# Altium PCB NRF52840-Beacon-V1-1.PcbDoc
Units mm, origin at the board's own origin, x right, y up, seen from the top; angles counter-clockwise.
Board outline 30 x 30 mm, 2 copper layers (Top Layer, Bottom Layer), stack 1.54 mm thick; 62 components, 49 nets, 185 pads, 133 vias.
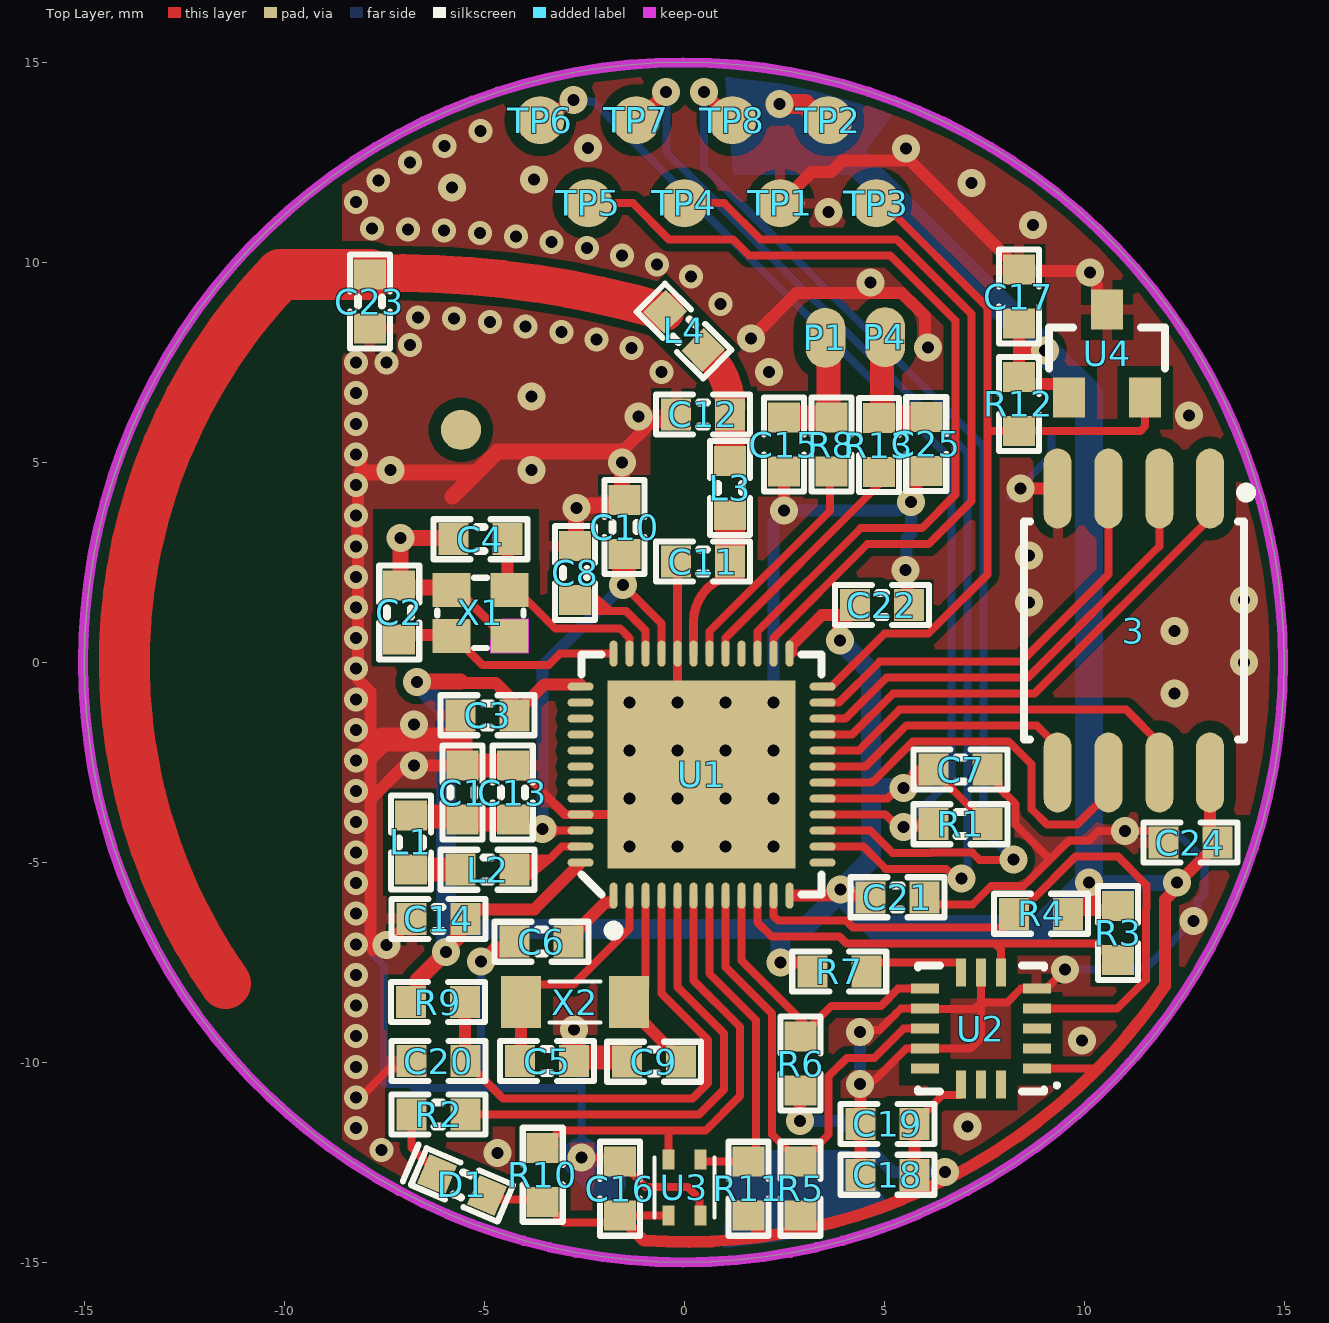
[diagram p0: Top Layer view]
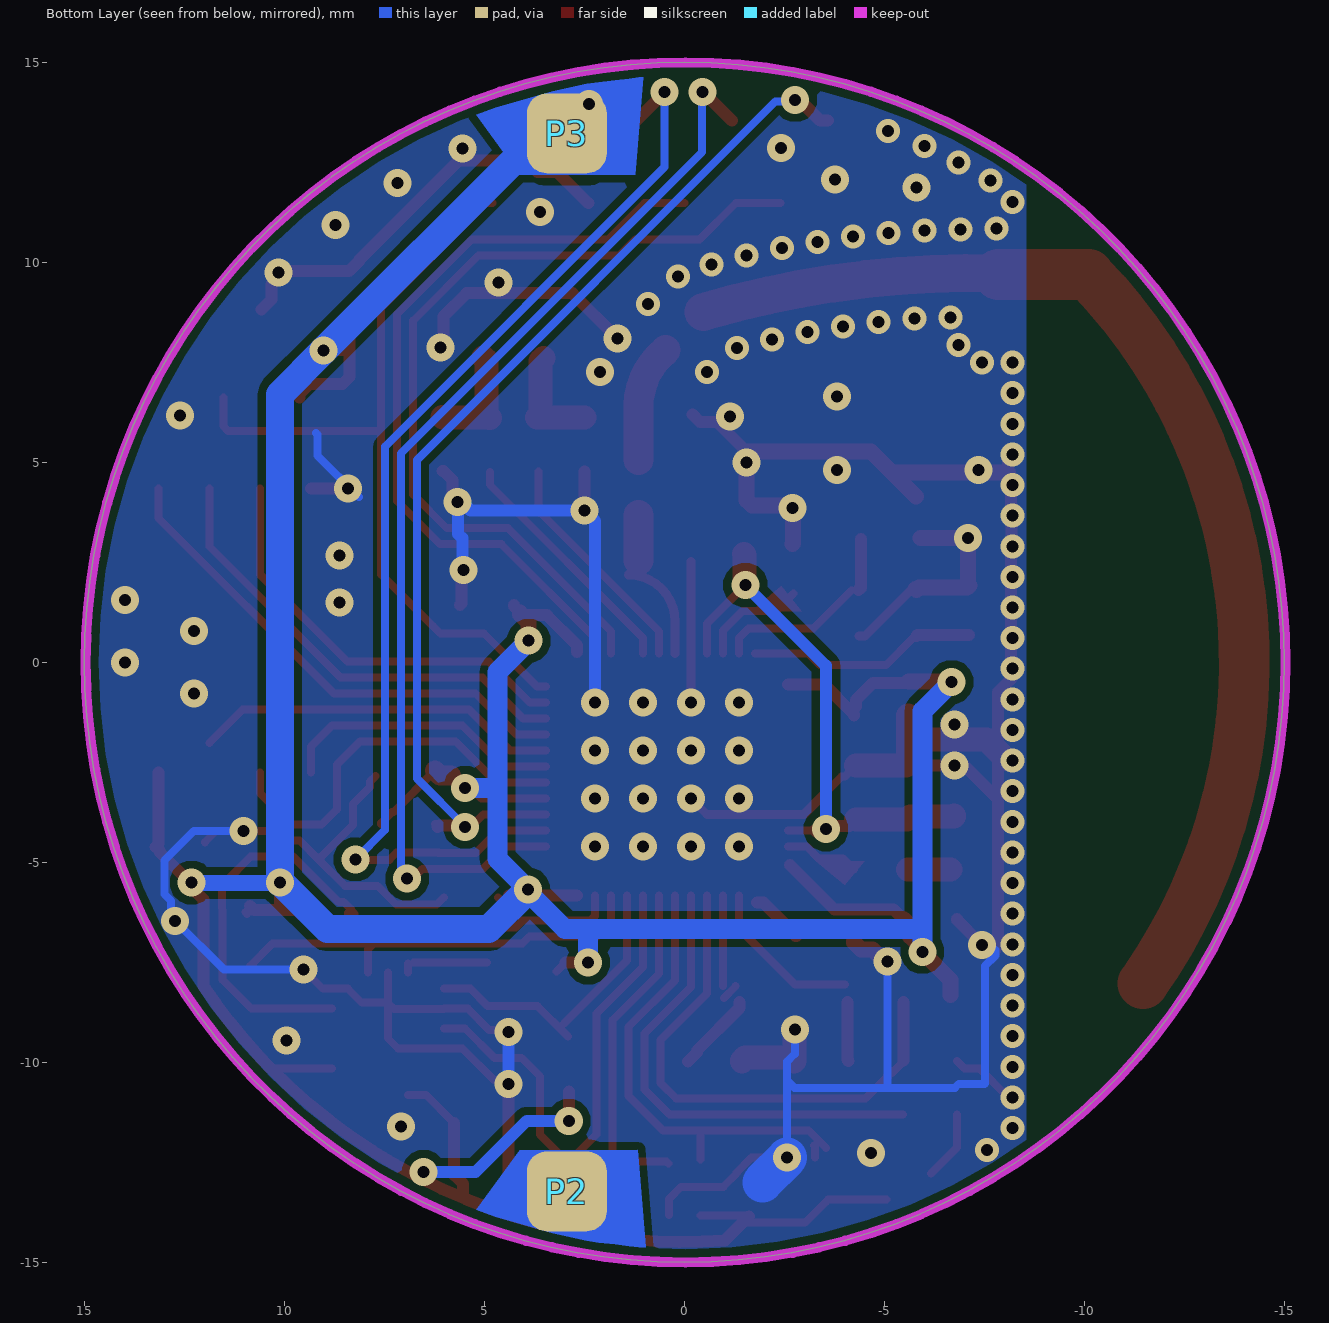
[diagram p1: Bottom Layer view, seen from below]

## Layer stack, top to bottom
Top Solder: solder mask 0.0102, Solder Resist, Dk 3.5
Top Layer: signal copper 0.035
Dielectric 1: dielectric 1.47, FR-4, Dk 4.6
Bottom Layer: signal copper 0.035
Bottom Solder: solder mask 0.0102, Solder Resist, Dk 3.5

## Board outline
-15,0 ccw(c0,0) 0,-15 ccw(c0,0) 15,0 ccw(c0,0) 0,15 ccw(c0,0)

## Design rules (kind name [scope] priority, off if disabled: settings)
Clearance [All] p1: gap=0.2 ignorepadtopadclearanceinfootprint=FALSE except(0.3: SMDPad-Poly THPad-Poly)
PolygonConnect [All] p1: thpad.connectstyle=Relief thpad.reliefconductorwidth=0.254 thpad.reliefentries=4 thpad.polygonreliefangle="90 Angle" thpad.airgapwidth=0.254 smdpad.connectstyle=Relief smdpad.reliefconductorwidth=0.254 smdpad.reliefentries=4 smdpad.polygonreliefangle="90 Angle" smdpad.airgapwidth=0.254 via.connectstyle=Direct via.reliefconductorwidth=0.254 via.reliefentries=4 via.polygonreliefangle="90 Angle" via.airgapwidth=0.254
RoutingVias [All] p1: holewidth=0.711 width=1.27 viastyle="Through Hole" minholewidth=0.711 minwidth=1.27 maxholewidth=0.711 maxwidth=1.27
SolderMaskExpansion [All] p1: expansion=0.102 istentingtop=FALSE
Width [All] p1: maxlimit=3 minlimit=0.2 preferedwidth=0.4
30 further rules are at their usual default settings.

## Components (designator, comment, footprint, x,y, rotation, side; value= is the part's Value field where it differs from the comment)
3 "W25Q-FLASH" SO8W_M 11.239,0.794 r270 top
C1 "1.0µF" CAPC1608N -5.546,-3.255 r270 top
C2 "12pF" CAPC1608N -7.128,1.246 r90 top
C3 "1.0µF" CAPC1608N -4.917,-1.324 r180 top
C4 "12pF" CAPC1608N -5.096,3.077 r180 top
C5 "12pF" CAPC1608N -3.429,-9.97 r0 top
C6 "100nF" CAPC1608N -3.572,-6.985 r180 top
C7 "100nF" CAPC1608N 6.906,-2.683 r0 top
C8 "100pF" CAPC1608N -2.728,2.234 r90 top
C9 "12pF" CAPC1608N -0.762,-9.986 r180 top
C10 "N.C." CAPC1608N -1.493,3.379 r270 top
C11 "1.0pF" CAPC1608N 0.471,2.517 r0 top
C12 "1.2pF" CAPC1608N 0.471,6.199 r0 top
C13 "47nF" CAPC1608N -4.288,-3.255 r90 top
C14 "100nF" CAPC1608N -6.144,-6.413 r180 top
C15 "300pF" CAPC1608N 2.492,5.445 r270 top
C16 "100nF" CAPC1608N -1.603,-13.16 r270 top
C17 "100nF" CAPC1608N 8.366,9.144 r90 top
C18 "10uF" CAPC1608N 5.08,-12.811 r180 top
C19 "100nF" CAPC1608N 5.08,-11.541 r180 top
C20 "1uF" CAPC1608N -6.144,-9.97 r180 top
C21 "100nF" CAPC1608N 5.334,-5.874 r0 top
C22 "100nF" CAPC1608N 4.937,1.429 r0 top
C23 "1.2pF" CAPC1608N -7.858,9.017 r270 top
C24 "100nF" CAPC1608N 12.652,-4.508 r180 top
C25 "300pF" CAPC1608N 6.048,5.461 r270 top
D1 "LED" LED_0603 -5.556,-13.065 r157 top
L1 "15nH" INDC1608N -6.836,-4.501 r270 top
L2 "10µH" INDC1608N -4.917,-5.186 r0 top
L3 "4.7nH" INDC1608N 1.145,4.358 r90 top
L4 "2.2nH" INDC1608N -0.006,8.286 r135 top
P1 "PIN" PIN#1 3.524,8.112 r90 top
P2 "PIN" PIN#2 4.985,-16.669 r180 bottom
P3 "PIN" PIN#3 2.984,13.224 r0 bottom
P4 "PIN" PIN#1 5.016,8.128 r90 top
R1 "10K" RESC1608N 6.906,-4.048 r0 top
R2 "1K" RESC1608N -6.144,-11.303 r180 top
R3 "10K" RESC1608N 10.843,-6.763 r270 top
R4 "10K" RESC1608N 8.922,-6.286 r180 top
R5 "10K" RESC1608N 2.905,-13.16 r90 top
R6 "10K" RESC1608N 2.905,-10.033 r90 top
R7 "10K" RESC1608N 3.873,-7.731 r0 top
R8 "0R" RESC1608N 3.678,5.445 r270 top
R9 "2M" RESC1608N -6.159,-8.493 r180 top
R10 "10K" RESC1608N -3.54,-12.811 r90 top
R11 "10K" RESC1608N 1.603,-13.16 r90 top
R12 "10K" RESC1608N 8.366,6.461 r270 top
R13 "0R" RESC1608N 4.863,5.429 r270 top
TP1 "PIN" PIN#4 2.4,11.478 r0 top
TP2 "PIN" PIN#4 3.6,13.556 r0 top
TP3 "PIN" PIN#4 4.8,11.478 r0 top
TP4 "PIN" PIN#4 0,11.478 r0 top
TP5 "PIN" PIN#4 -2.4,11.478 r0 top
TP6 "PIN" PIN#4 -3.6,13.556 r0 top
TP7 "PIN" PIN#4 -1.2,13.556 r0 top
TP8 "PIN" PIN#4 1.2,13.556 r0 top
U1 "nRF52840-QFAA" QFN40P600X600X90-48N 0.432,-2.806 r90 top
U2 "LIS3DH" LGA-16 7.414,-9.16 r180 top
U3 "SHT40" SHT40 0,-13.129 r270 top
U4 "DRV5032" SOT-23 10.573,7.715 r0 top
X1 "32MHz" CRYSTAL_2016_NT -5.096,1.235 r180 top
X2 "32.768kHz" CRYSTAL_3215 -2.73,-8.493 r180 top

## Footprints (in the part's own frame and the unit in brackets; to place one, negate y for a bottom-side part, rotate by r counter-clockwise, add the part's x,y. Pads: shape width x height; smd on the part's side, far side on the other; paste and mask are expansions set on the pad)
CAPC1608N [mm] "Chip Capacitor, Body 1.6x0.8mm, IPC Medium Density"
  rect 0.75x0.8 smd: 1(-0.675,0) 2(0.675,0)
  silkscreen extent -1.17,-0.5 1.18,0.5, body extent -0.8,-0.4 0.8,0.4, height 0.8
CRYSTAL_2016_NT [mm]
  rect 0.95x0.85 smd: 1(-0.725,-0.575) 2(-0.725,0.575) 2(0.725,-0.575) 3(0.725,0.575)
  Top Layer lines w0.225: 0.725,-0.575 0.709,-0.575 0.575,-0.575 -0.575,0.575 -0.725,0.575
  Top Layer keep-out lines w0.01: -0.25,0.65 -0.25,1 -1.2,1 -1.2,0.15 -0.55,0.15
  silkscreen extent -1.08,-0.88 1.08,0.88, body extent -1.05,-0.85 1.05,0.85, height 0.56
CRYSTAL_3215 [mm] "3.2mm * 1.5mm"
  rect 1x1.3 smd: 1(-1.35,0) 2(1.35,0)
  silkscreen extent -0.64,-0.51 0.64,0.51, body extent -1.6,-0.5 1.6,0.5, height 0.8
INDC1608N [mm] "Chip Inductor, Body 1.6x0.8mm, IPC Medium Density"
  rect 0.75x0.8 smd: 1(-0.675,0) 2(0.675,0)
  silkscreen extent -1.18,-0.5 1.17,0.5, body extent -0.8,-0.4 0.8,0.4, height 0.8
LED_0603 [mm]
  rect 0.75x0.8 smd: 1(-0.675,0) 2(0.675,0)
  silkscreen extent -1.17,-0.5 1.4,0.5, body extent -1.25,-0.55 1.25,0.55, height 0.8
LGA-16 [mm] "LGA, 16-Leads, Body 3x3mm, Pitch 0.5mm"
  rect 0.7x0.25 smd: 1(-1.4,1) 2(-1.4,0.5) 3(-1.4,0) 4(-1.4,-0.5) 5(-1.4,-1) 9(1.4,-1) 10(1.4,-0.5) 11(1.4,0) 12(1.4,0.5) 13(1.4,1)
  rect 0.25x0.7 smd: 6(-0.5,-1.4) 7(0,-1.4) 8(0.5,-1.4) 14(0.5,1.4) 15(0,1.4) 16(-0.5,1.4)
  silkscreen extent -1.95,-1.58 1.58,1.58, body extent -1.5,-1.5 1.5,1.5, height 1
PIN#1 [mm]
  oval 1.5x1 smd: 1(0,0)
PIN#2 [mm]
  rrect50% 2x2 smd: 1(2.048,3.445)
PIN#3 [mm]
  rrect50% 2x2 smd: 1(-0.048,0)
PIN#4 [mm]
  round 1.2 smd paste-2539.97: 1(0,0)
QFN40P600X600X90-48N [mm] "QFN, 48-Leads, Body 6,0x6,0mm (max), Pitch 0,40mm, IPC Medium Density"
  oval 0.65x0.2 smd: 1(-3.025,2.2) 2(-3.025,1.8) 3(-3.025,1.4) 4(-3.025,1) 5(-3.025,0.6) 6(-3.025,0.2) 7(-3.025,-0.2) 8(-3.025,-0.6) 9(-3.025,-1) 10(-3.025,-1.4) 11(-3.025,-1.8) 12(-3.025,-2.2) 25(3.025,-2.2) 26(3.025,-1.8) 27(3.025,-1.4) 28(3.025,-1) 29(3.025,-0.6) 30(3.025,-0.2) 31(3.025,0.2) 32(3.025,0.6) 33(3.025,1) 34(3.025,1.4) 35(3.025,1.8) 36(3.025,2.2)
  oval 0.2x0.65 smd: 13(-2.2,-3.025) 14(-1.8,-3.025) 15(-1.4,-3.025) 16(-1,-3.025) 17(-0.6,-3.025) 18(-0.2,-3.025) 19(0.2,-3.025) 20(0.6,-3.025) 21(1,-3.025) 22(1.4,-3.025) 23(1.8,-3.025) 24(2.2,-3.025) 37(2.2,3.025) 38(1.8,3.025) 39(1.4,3.025) 40(1,3.025) 41(0.6,3.025) 42(0.2,3.025) 43(-0.2,3.025) 44(-0.6,3.025) 45(-1,3.025) 46(-1.4,3.025) 47(-1.8,3.025) 48(-2.2,3.025)
  rect 4.7x4.7 smd: 49(0,0)
  silkscreen extent -4.02,-3 3,3, body extent -3.02,-3.02 3.02,3.02, height 0.86
RESC1608N [mm] "Chip Resistor, Body 1.6x0.8mm, IPC Medium Density"
  rect 0.75x0.8 smd: 1(-0.675,0) 2(0.675,0)
  silkscreen extent -1.17,-0.5 1.17,0.5, body extent -0.82,-0.48 0.82,0.48, height 0.5
SHT40 [mm]
  rect 0.5x0.3 smd: 1(-0.7,0.4) 2(-0.7,-0.4) 3(0.7,-0.4) 4(0.7,0.4)
  silkscreen extent -0.75,-0.75 0.75,0.75, body extent -0.75,-0.75 0.75,0.75, height 0.69
SO8W_M [mm] "8-Pin Small Outline Package 1.27 mm Pitch, IPC Low Density"
  oval 2x0.7 smd: 1(-3.55,1.905) 2(-3.55,0.635) 3(-3.55,-0.635) 4(-3.55,-1.905) 5(3.55,-1.905) 6(3.55,-0.635) 7(3.55,0.635) 8(3.55,1.905)
  silkscreen extent -3.57,-2.75 2.73,2.93, body extent -4.05,-2.73 4.05,2.73, height 1.75
SOT-23 [mm] "SOT-23; 3 Leads; Body 3.0 x 2.6 mm, inc. leads (LxW max)"
  rect 0.8x1 smd: 1(-0.95,-1.1) 2(0.95,-1.1) 3(0,1.1)
  silkscreen extent -1.45,-0.38 1.45,0.65, body extent -1.95,-2.31 1.95,2.31, height 0.25

## Part data
C1 C3: library part C0402-1µ0, "Capacitor, X5R, ±10%", Component Class=Capacitors, Footprint Doc=0402, LatestRevisionDate=2016-08-22, Pad Count=2, Part Number=C0402-1µ0, Published=2009-05-08
C2 C4 C5 C9 C15 C16 C17 C18 C19 C20 C24 C25: library part C0201-12p, "Capacitor, NP0, ±2%", Component Class=Capacitors, Footprint Doc=0201, LatestRevisionDate=2017-11-09, Pad Count=2, Part Number=C0201-12p, Published=2014-11-13
C6 C7 C14 C21 C22: library part C0201-100n, "Capacitor, X5R, ±10%", Component Class=Capacitors, Footprint Doc=0201, LatestRevisionDate=2017-11-09, Pad Count=2, Part Number=C0201-100n, Published=2014-11-13
C8: library part C0201-100p, "Capacitor, NP0, ±5%", Component Class=Capacitors, Footprint Doc=0201, LatestRevisionDate=2019-04-16, Pad Count=2, Part Number=C0201-100p, Published=2019-04-16
C10: library part C0201-N.C., "Not mounted", Assembly="Not mounted", Component Class=Capacitors, Footprint Doc=0201, LatestRevisionDate=2014-11-13, Pad Count=2, Part Number=C0201-N.C., Published=2014-11-13
C11: library part C0201-1.0p, "Capacitor, NP0, ±10%", Component Class=Capacitors, Footprint Doc=0201, LatestRevisionDate=2018-10-22, Pad Count=2, Part Number=C0201-1.0p, Published=2014-11-13
C12 C23: library part C0201-1.2p, "Capacitor, NP0, ±10%", Component Class=Capacitors, Footprint Doc=0201, LatestRevisionDate=2020-10-13, Pad Count=2, Part Number=C0201-1.2p, Published=2014-11-13
C13: library part C0201-47n, "Capacitor, X5R, ±10%", Component Class=Capacitors, Footprint Doc=0201, LatestRevisionDate=2017-11-09, Pad Count=2, Part Number=C0201-47n, Published=2014-11-13
L1: library part L0402-15n, "High frequency chip inductor ±10%", Component Class=Inductors, Footprint Doc=0402, LatestRevisionDate=2012-09-19, Pad Count=2, Part Number=L0402-15n, Published=2010-07-12
L2: library part L0603-10µ-TDK, "Chip inductor, IDC,min = 50 mA, ±20%", Component Class=Inductors, Footprint Doc=0603, LatestRevisionDate=2012-09-19, Pad Count=2, Part Number=L0603-10µ-TDK, Published=2019-05-06
L3: library part L0201-4n7, "High frequency chip inductor ±5%", Component Class=Inductors, Footprint Doc=0201, LatestRevisionDate=2013-04-10, Pad Count=2, Part Number=L0201-4n7, Published=2013-04-10
L4: library part L0201-2n2, "High frequency chip inductor ±5%", Component Class=Inductors, Footprint Doc=0201, LatestRevisionDate=2013-04-10, Pad Count=2, Part Number=L0201-2n2, Published=2013-04-10
R1 R2 R3 R4 R5 R6 R7 R8 R9 R10 R11 R12 R13: library part Resistor
U1: "Multi-protocol Bluetooth Low Energy, IEEE 802.15.4, ANT and 2.4GHz proprietary system-on-chip", Component Class=nRF_Devices, Footprint Doc=QFN-48, LatestRevisionDate=2016-11-22, Pad Count=48, Part Number=nRF52840-QFAA, Published=2016-03-31
U2: "MEMS Digital Output Motion Sensor Ultra Low-Power High Performance 3-Axes \"nano\" Accelerometer, 1.71 to 3.6 V, -40 to 85 degC, 16-pin (LGA-16), Pb-Free, Tray", Current Consumption in Power-Down mode="0.5 uA", Manufacturer=STMicroelectronics, Operating Temperature="-40 to 85 degC", Wide Supply Voltage="1.71 to 3.6 V", Bandwidth="5 kHz", ComponentLink1Description="Manufacturer URL", ComponentLink1URL=http://www.st.com/, ComponentLink2Description=Datasheet, ComponentLink2URL=http://www.st.com/st-web-ui/static/active/en/resource/technical/document/datasheet/CD00274221.pdf, ComponentLink3Description="Package Specification", ComponentLink3URL=http://www.st.com/st-web-ui/static/active/en/resource/technical/document/datasheet/CD00274221.pdf, DatasheetVersion="Rev. 1", Interface="I2C, SPI", Mounting Technology="Surface Mount", Output Type=Digital, PackageDescription="16-Pin Land Grid Array, Body 3 x 3 mm, Pitch 0.5 mm", PackageReference=LGA-16, Packing=Tray, PartNumber=LIS3DH, RoHS=TRUE
U3: "High-Accuracy, Ultra-Low-Power, 16-bit, Relative Humidity and Temperature Sensor"
U4: library part Hall_Effect_Sensor_Switch, "ultra-low-power digital-switch Hall effect sensor"
X1: library part XTAL_SMD2016_32MHz_8pF_General_NT, "XTAL SMD 2016, 32MHz, Cl=8pF, Total Tol: ±30ppm", Component Class=Oscillators, Footprint Doc=XTAL_2016, LatestRevisionDate=2021-04-08, Pad Count=4, Part Number=XTAL_SMD2016_32MHz_8pF_General_NT, Published=2021-04-08
X2: library part Crystal_Oscillator_2PIN
D1: DatasheetVersion=16-Apr-2002, LatestRevisionDate=17-Dec-2003, LatestRevisionNote="PCB Footprint replaced.", PackageReference=3.5X2.8X1.9, PackageVersion=16-Apr-2002, Published=8-Jun-2000, Publisher="Altium Limited"

## Free pads (board coordinates)
  round 1 smd paste-2539.97: 0(-5.584,5.81)

## Via types
v1: diameter 0.7, hole 0.3, Top Layer to Bottom Layer, 60 vias
v2: diameter 0.6, hole 0.3, Top Layer to Bottom Layer, 53 vias
v3: diameter 0.7, hole 0.3, Top Layer to Bottom Layer, tented bottom, 20 vias

## Nets (pads, with @x,y where several pads share a name; then routed paths per layer and width w, separated by ;. In a path a pad name is that pad's centre, name@x,y a point inside that pad or via, vN(x,y) a via of type N, cw(c..) or ccw(c..) an arc to the next point about the centre after c; other vN are vias at no path point)
ANT: C23.1 L4.2 | length 29
  Top Layer w0.95: C23.1@-7.859,9.727 cw(c-7.282,-14.577) L4.2
  Top Layer w1.27: -11.468,-8.03 cw(c0,0) -10.103,9.692 C23.1
BAT-HLDR: P2.1
DEC1: C6.1 U1.1 | length 1.4
  Top Layer w0.3: C6.1@-2.808,-6.837 -2.774,-6.837 -2.672,-6.735 -2.672,-6.701 -1.977,-6.006 U1.1@-1.818,-6.006
DEC3: C8.1 U1.34 | length 2.7
  Top Layer w0.2: C8.1@-2.728,1.718 -2.291,1.281 -1.456,1.281 -0.968,0.793 U1.34
DEC4_6: C1.2 C10.2 C13.1 L1.1 U1.33 U1.46 | length 14.1
  Top Layer w0.2: v3(-3.54,-4.168) -3.503,-4.206 U1.46 ; v3(-1.527,1.931) -0.568,0.972 U1.33
  Top Layer w0.3: C13.1 -4.127,-4.092 -3.617,-4.092 v3(-3.54,-4.168)
  Top Layer w0.6: L1.1@-6.736,-3.826 -6.736,-3.85 -5.651,-3.85 -5.571,-3.93 C13.1 ; v3(-1.527,1.931) -1.51,1.948 -1.51,2.687 C10.2
  Bottom Layer w0.3: v3(-3.54,-4.168) -3.54,-0.082 v3(-1.527,1.931)
GND: 3.4 C1.1 C2.2 C3.2 C4.2 C5.2 C6.2 C7.2 C8.2 C9.2 C10.1 C11.1 C12.1 C13.2 C14.2 C15.2 C16.1 C17.2 C18.2 C19.2 C20.2 C21.2 C22.2 C23.2 C24.2 C25.2 TP1.1 U1.32 U1.45 U1.49 U2.5 U2.7 U2.10 U2.12 U3.4 U4.3 X1.2 | length 134.7
  Top Layer w0.2: v2(-8.207,-10.878) -8.099,-10.878 -7.376,-10.156 -7.005,-10.156 C20.2 ; C13.2 -4.013,-2.855 -3.934,-2.855 -3.503,-3.286 ; v1(-2.572,-12.383) -1.681,-12.383 -1.303,-12.76 -1.303,-12.785 -0.976,-13.113 0.079,-13.113 0.385,-13.419 U3.4@0.385,-13.814 ; U1.49@-0.568,-3.806 v1(-0.168,-3.406) ; v1(4.397,-10.538) 4.493,-10.443 4.76,-10.443 5.543,-9.66 U2.12 7.152,-9.66 7.414,-9.398 7.414,-8.509 ; v1(4.397,-9.238) 4.446,-9.189 4.882,-9.189 5.411,-8.66 U2.10 6.021,-8.668 7.255,-8.668 7.414,-8.509 ; C21.2 6.195,-6.059 7.199,-6.059 7.672,-5.586 8.485,-5.586 9.144,-4.928 ; U2.7 7.414,-8.509 ; C7.2@7.714,-2.842 7.856,-2.983 7.856,-3.117 8.284,-3.545 8.284,-4.068 9.144,-4.928 ; v1(9.517,-7.681) 9.039,-8.16 U2.5 8.413,-8.16 8.064,-8.509 7.414,-8.509 ; C24.2 11.977,-4.487 11.702,-4.212 v1(11.023,-4.212) 10.36,-4.212 10.115,-4.456 9.615,-4.456 9.144,-4.928
  Top Layer w0.229: -3.503,-3.286 -2.984,-3.806 U1.45 U1.49@-0.568,-3.806 ; v1(-0.168,-1.006) U1.32 C11.1@-0.168,2.517
  Top Layer w0.3: v2@-8.086,5.149 -8.086,4.747 -8.086,4.494 -8.162,4.417 -8.162,3.712 v2(-8.207,3.667) -8.185,3.645 -8.185,2.924 -8.163,2.902 -8.163,1.37 -8.163,-0.425 -7.842,-0.746 -7.842,-0.926 -7.842,-2.222 -7.842,-3.223 -7.842,-3.419 ; -7.842,-6.972 -7.842,-5.52 -7.842,-3.419 ; -7.779,-7.191 -7.766,-7.178 -7.766,-6.972 -7.352,-6.972 -6.819,-6.439 C14.2 ; C1.1@-5.546,-2.578 -5.547,-2.578 -7.002,-2.578 -7.842,-3.419 ; v1@-1.561,5.267 -0.821,6.006 -0.398,6.006 C12.1 ; v1(1.667,8.096) 2.799,9.228 5.44,9.228 6.019,8.649 6.019,7.951 v1(6.096,7.874) ; TP1.1 3.178,12.255 3.667,12.255 3.953,12.541 5.644,12.541 8.116,10.069 8.116,10.044 8.377,9.783 10.108,9.783 v1(10.144,9.747) 10.144,9.639 10.323,9.46 10.323,9.065 U4.3 ; v1@2.492,3.659 C15.2 ; v1(4.397,-10.538) 4.401,-10.542 C18.2@4.401,-12.807 ; v1(5.524,2.303) 5.568,2.259 5.568,1.473 C22.2 ; v1(5.673,4.013) 5.673,4.121 5.798,4.246 5.798,4.561 6.023,4.786 C25.2 ; v1(8.404,4.344) 3.4
  Top Layer w0.4: -8.086,4.747 -7.352,4.747 -7.345,4.753 -7.082,4.753 -7.076,4.747 -5.19,4.747 ; C2.2 -7.072,1.866 X1.2@-5.877,1.866 ; C2.2@-7.096,1.916 v1(-7.096,3.111) C4.2@-5.901,3.111 ; X1.2@-5.861,1.866 -5.813,1.818 -5.805,1.81 X1.2@-5.78,1.835 ; -5.796,4.141 -5.19,4.747 ; v1(-5.08,-7.477) -4.999,-7.477 -4.707,-7.185 -4.422,-7.185 -4.247,-7.01 C6.2 ; C8.2@-2.699,2.959 -2.713,2.973 -2.713,3.843 -2.641,3.915 -1.693,3.915 -1.561,4.048 -1.561,5.001 -1.561,5.267 -4.67,5.267 -5.19,4.747
  Top Layer w0.6: v2@-8.033,-2.413 -7.842,-2.222 -7.549,-1.929 -5.613,-1.929 ; C3.2 -5.592,-2.533 -5.547,-2.578 C1.1 C13.2 ; v1(-2.762,-9.176) -2.758,-9.18 -2.758,-9.965 C5.2 C5.2@-2.746,-9.978 ; C5.2@-2.654,-9.886 -1.512,-9.886 -1.445,-9.953 C9.2@-1.445,-9.978
  Bottom Layer w0.2: -7.779,-7.191 -7.779,-7.327 -7.512,-7.594 -7.512,-10.534 -7.509,-10.536 -6.862,-10.536 -6.762,-10.636 -5.107,-10.636 ; v1(-5.08,-7.477) -5.08,-10.609 -5.107,-10.636 ; v1(-2.762,-9.176) -2.762,-9.787 -2.572,-9.978 -2.572,-10.454 ; v1(-2.572,-12.383) -2.572,-10.454 ; v1@8.137,4.131 9.175,5.17 9.175,5.694 9.212,5.731 ; v1(9.517,-7.681) 11.512,-7.681 v1(12.732,-6.461) 12.827,-6.365 12.827,-5.967 13.002,-5.793 13.002,-4.953 12.26,-4.212 v1(11.023,-4.212) ; -5.107,-10.636 -2.754,-10.636 -2.572,-10.454
  Bottom Layer w0.3: v1(2.232,-1.006) 2.232,3.534 v1(2.492,3.794) 5.346,3.794 5.565,4.013 5.661,3.917 5.661,3.213 5.551,3.103 5.551,2.329 v1(5.524,2.303) ; v1(4.397,-10.538) v1(4.397,-9.238)
  Bottom Layer w1: v1(-2.572,-12.383) -1.953,-13.002
  other v1: -4.667,-12.271 7.08,-11.605 9.941,-9.453 -7.448,-7.067 -1.368,-4.606 -0.168,-4.606 1.032,-4.606 2.232,-4.606 -1.368,-3.406 1.032,-3.406 2.232,-3.406 -6.753,-2.578 -1.368,-2.206 -0.168,-2.206 1.032,-2.206 2.232,-2.206 -6.753,-1.554 -1.368,-1.006 1.032,-1.006 12.255,-0.778 13.986,0 12.255,0.778 8.62,1.492 13.986,1.556 8.62,2.667 -2.699,3.858 -7.352,4.81 -3.816,4.81 -1.556,5.001 -1.143,6.144 12.611,6.172 -3.816,6.652 2.111,7.255 4.651,9.493 8.715,10.938 3.604,11.255 -5.81,11.874 7.175,11.986 -3.762,12.065 -2.413,12.859 5.54,12.843
  other v2: -7.572,-12.192 -8.207,-11.644 -8.207,-10.113 -8.207,-9.347 -8.207,-8.582 -8.207,-7.816 -8.207,-7.051 -8.207,-6.285 -8.207,-5.52 -8.207,-4.754 -8.207,-3.988 -8.207,-3.223 -8.207,-2.457 -8.207,-1.692 -8.207,-0.926 -8.207,-0.161 -8.207,0.605 -8.207,1.37 -8.207,2.136 -8.207,2.902 -8.207,4.433 -8.207,5.198 -8.207,5.964 -8.207,6.729 -0.572,7.255 -8.207,7.495 -7.442,7.495 -1.321,7.857 -6.858,7.938 -2.195,8.071 -3.075,8.26 -3.965,8.396 -4.858,8.509 -5.754,8.591 -6.653,8.626 0.905,8.954 0.161,9.64 -0.684,9.949 -1.557,10.17 -2.436,10.359 -3.324,10.51 -4.214,10.643 -5.11,10.728 -6.007,10.793 -6.907,10.821 -7.807,10.848 -8.207,11.505 -7.652,12.049 -6.858,12.494 -6.001,12.906 -5.096,13.287
HES-OUT: R12.2 TP3.1 U1.24 U4.2 | length 20.5
  Top Layer w0.2: U1.24 3.682,-0.606 5.002,0.714 6.096,0.714 6.11,0.729 ; TP3.1 4.973,11.478 7.579,8.872 7.579,5.81 ; 6.111,0.729 6.287,0.904 7.579,2.196 7.579,5.81 ; U4.2 11.523,5.903 11.406,5.786 R12.2 7.603,5.786 7.579,5.81
HTS-SCL: R10.2 U1.6 U3.2 | length 12
  Top Layer w0.2: R10.2 -3.11,-11.706 -0.4,-11.706 ; R10.2@-3.266,-12.385 -3.266,-12.102 R10.2@-3.24,-12.076 ; U3.2 -0.4,-11.706 ; U1.6 0.232,-7.951 1.394,-9.113 1.394,-10.846 0.534,-11.706 -0.4,-11.706
HTS-SDA: R11.2 U1.7 U3.1 | length 8.1
  Top Layer w0.2: U3.1@0.4,-12.535 0.45,-12.485 R11.2 ; U1.7 0.632,-7.786 1.794,-8.947 R11.2@1.794,-12.271
LED: R2.1 U1.5 | length 12.1
  Top Layer w0.2: R2.1 -5.465,-11.306 0.368,-11.306 0.994,-10.68 0.994,-9.279 -0.168,-8.117 U1.5
MEMS-INT1: R5.2 U1.8 U2.11 | length 12.7
  Top Layer w0.2: U1.8 1.032,-7.62 2.194,-8.782 2.194,-11.799 R5.2@2.88,-12.485 ; R5.2@2.93,-12.485 3.605,-11.81 3.605,-10.349 4.066,-9.888 4.748,-9.888 5.477,-9.16 U2.11
MEMS-INT2: R6.2 U1.9 U2.9 | length 7.5
  Top Layer w0.2: U1.9 1.432,-7.454 R6.2@3.005,-9.027 ; R6.2 3.675,-8.588 4.917,-8.588 5.346,-8.16 U2.9
MEMS-SCL: R4.2 U1.11 U2.4 | length 16.6
  Top Layer w0.2: U1.11 2.232,-6.339 2.349,-6.456 4.042,-6.456 4.217,-6.631 8.013,-6.631 8.058,-6.587 8.13,-6.587 8.406,-6.312 R4.2@8.406,-6.261 ; R4.2 8.339,-6.195 8.339,-6.17 8.522,-5.986 8.63,-5.986 8.639,-5.978 8.659,-5.978 9.781,-4.856 10.841,-4.856 11.498,-5.513 11.557,-5.572 11.557,-5.656 11.543,-6.671 11.543,-7.937 10.82,-8.66 U2.4
MEMS-SDA: R3.2 U1.10 U2.6 | length 10.9
  Top Layer w0.2: U1.10 1.832,-6.504 2.184,-6.856 3.876,-6.856 4.051,-7.031 7.766,-7.031 ; U2.6 7.914,-7.179 7.766,-7.031 ; R3.2@10.858,-7.596 10.293,-7.031 7.766,-7.031
NetC11_2: C11.2 L3.1 U1.31 | length 3.8
  Top Layer w0.229: U1.31 0.232,1.016 cw(c1.402,1.021) C11.2@1.397,2.191
  Top Layer w0.75: C11.2@1.145,2.544 L3.1
NetC12_2: C12.2 L3.2 L4.1 | length 3
  Top Layer w0.75: L4.1@0.467,7.803 cw(c-0.725,6.352) C12.2 ; L3.2@1.143,5.06 C12.2@1.143,6.199
NetC15_1: C15.1 P1.1 R8.1 | length 2.7
  Top Layer w0.6: C15.1 R8.1@3.676,6.12 ; P1.1@3.524,7.604 3.601,7.528 3.601,6.195 R8.1@3.676,6.12 ; R8.1 R8.1@3.676,6.12
NetC25_1: C25.1 P4.1 R13.1 | length 2.8
  Top Layer w0.6: R13.1 R13.1 R13.1@4.881,6.12 ; P4.1@5.016,7.62 4.94,7.543 4.94,6.179 R13.1@4.881,6.12 ; C25.1 6.032,6.12 R13.1@4.881,6.12
NetD1_2: D1.2 R2.2 | length 1.7
  Top Layer w0.2: R2.2 -6.819,-12.129 D1.2@-6.168,-12.78
NetL1_2: L1.2 L2.1 | length 1.1
  Top Layer w0.6: L1.2@-6.657,-5.176 -6.652,-5.181 -5.597,-5.181 L2.1
NetL2_2: L2.2 U1.47 | length 1.9
  Top Layer w0.2: L2.2 -4.242,-5.18 -3.967,-4.905 -3.358,-4.905 -3.059,-4.606 U1.47
NetR7_2: R7.2 U2.8 | length 2.1
  Top Layer w0.2: 4.935,-7.509 6.771,-7.509 ; U2.8 U2.8@6.914,-7.535
NFC1: R13.2 U1.29 | length 6.1
  Top Layer w0.2: U1.29 1.032,0.444 1.032,0.61 4.863,4.441 R13.2
NFC2: R8.2 U1.30 | length 5.8
  Top Layer w0.2: U1.30 0.632,0.61 0.632,0.776 3.646,3.79 R8.2@3.646,4.77
P0.00/XL1: C5.1 U1.2 X2.2 | length 5.5
  Top Layer w0.2: X2.2@-4.016,-8.055 -2.767,-8.055 -1.368,-6.655 U1.2
  Top Layer w0.3: C5.1 -4.081,-9.947 X2.2
P0.01/XL2: C9.1 U1.3 X2.1 | length 5.1
  Top Layer w0.2: X2.1@-1.285,-8.096 X2.1@-0.992,-8.39 ; X2.1@-0.968,-8.096 U1.3 ; C9.1@-0.362,-9.686 -0.173,-9.874 -0.087,-9.961 C9.1
  Top Layer w0.3: X2.1 -1.381,-8.643 -0.312,-9.712 -0.312,-9.761 C9.1
P0.02/AIN0: U1.40
P0.03/AIN1: U1.39
P0.13: U1.13
P0.28/AIN4: U1.41
P0.29/AIN5: U1.42
P0.30/AIN6: U1.43
P0.31/AIN7: U1.44
P1.15: U1.38
QSPI-CSN: 3.1 U1.21 | length 12.7
  Top Layer w0.2: U1.21 4.195,-1.806 5.217,-0.784 5.233,-0.784 5.234,-0.783 8.758,-0.783 13.144,3.604 3.1
QSPI-IO0: 3.5 U1.19 | length 7.2
  Top Layer w0.2: U1.19 4.527,-2.606 5.55,-1.583 8.811,-1.583 9.335,-2.106 3.5
QSPI-IO1: 3.2 U1.22 | length 11.6
  Top Layer w0.2: U1.22 4.029,-1.406 5.051,-0.384 5.067,-0.384 5.069,-0.383 8.592,-0.383 11.874,2.899 3.2
QSPI-IO2: 3.3 U1.23 | length 10.6
  Top Layer w0.2: U1.23 3.864,-1.006 4.885,0.016 4.902,0.016 4.903,0.017 8.427,0.017 10.604,2.195 3.3
QSPI-IO3: 3.7 U1.20 | length 9.2
  Top Layer w0.2: U1.20 4.361,-2.206 5.384,-1.183 11.041,-1.183 3.7@11.874,-2.016
QSPI-SCK: 3.6 U1.18 | length 9.9
  Top Layer w0.2: U1.18 4.596,-3.006 4.676,-3.006 4.718,-2.964 4.734,-2.964 5.715,-1.983 8.111,-1.983 8.684,-2.557 8.684,-3.675 9.065,-4.056 9.819,-4.056 10.604,-3.271 3.6
RESET: R1.1 TP6.1 U1.16 | length 26.8
  Top Layer w0.2: U1.16 5.026,-3.806 5.332,-4.112 v3@5.467,-4.112 ; R1.1@6.167,-4.112 R1.1
  Top Layer w0.3: TP6.1@-3.588,13.544 -3.393,13.544 -2.879,14.058 v3(-2.771,14.058) ; v3@5.467,-4.112 5.499,-4.08 6.135,-4.08 R1.1@6.167,-4.112
  Bottom Layer w0.2: v3(-2.771,14.058) -2.739,14.026 -2.283,14.026 6.683,5.06 6.683,-2.904 v3@5.476,-4.112
  other v3: 5.479,-4.112
SWDCLK: TP5.1 U1.27 | length 21.7
  Top Layer w0.2: TP5.1 -1.286,11.478 -0.381,10.573 1.222,10.573 1.619,10.176 5.143,10.176 6.779,8.541 6.779,4.193 5.939,3.353 4.409,3.353 1.832,0.776 U1.27
SWDIO: TP4.1 U1.26 | length 19.8
  Top Layer w0.2: TP4.1 1,11.478 1.902,10.576 5.309,10.576 5.352,10.533 7.179,8.706 7.179,4.027 6.105,2.953 4.575,2.953 2.232,0.61 2.232,0.444 U1.26
UART-RX: TP8.1 U1.15 | length 28.4
  Top Layer w0.2: U1.15 4.65,-4.206 5.206,-4.762 6.148,-4.762 6.15,-4.759 7.199,-4.759 7.377,-4.936 8.216,-4.936 v3(8.224,-4.928)
  Top Layer w0.3: v3@0.492,14.24 0.504,14.24 TP8.1@1.188,13.556
  Bottom Layer w0.2: v3@0.492,14.24 0.492,12.383 7.483,5.391 7.483,-4.187 v3(8.224,-4.928)
  other v3: 0.492,14.256
UART-TX: TP7.1 U1.14 | length 27.7
  Top Layer w0.2: U1.14 4.479,-4.606 5.035,-5.162 6.547,-5.162 6.795,-5.409 v3(6.93,-5.409)
  Top Layer w0.3: TP7.1@-1.188,13.545 -0.478,14.256 v3(-0.455,14.256)
  Bottom Layer w0.2: v3(-0.455,14.256) -0.444,14.244 -0.444,12.753 7.083,5.226 7.083,-5.256 v3(6.93,-5.409)
V-ADC: C20.1 R9.1 U1.4 | length 13.3
  Top Layer w0.2: C20.1@-5.485,-9.954 C20.1 -5.469,-9.995 -5.194,-10.27 -5.169,-10.27 -4.532,-10.906 0.202,-10.906 0.594,-10.514 0.594,-9.444 -0.568,-8.283 U1.4
  Top Layer w0.3: C20.1@-5.485,-9.954 R9.1
V-BAT: 3.8 C3.1 C7.1 C14.1 C16.2 C17.1 C18.1 C19.1 C21.1 C22.1 C24.1 D1.1 P3.1 R1.2 R3.1 R4.1 R5.1 R6.1 R7.1 R9.2 R10.1 R11.1 R12.1 TP2.1 U1.12 U1.17 U1.25 U1.37 U1.48 U2.1 U2.14 U3.3 U4.1 | length 122.7
  Top Layer w0.2: D1.1@-5.056,-13.43 -3.596,-13.43 R10.1 -3.023,-14.003 C16.2@-1.603,-14.003 ; C16.2@-1.578,-13.835 U3.3@-0.407,-13.835 ; R6.1@2.889,-10.724 R6.1 ; R7.1@2.973,-7.506 R7.1 ; U1.17 5.077,-3.406 v3@5.412,-3.071 ; C21.1@4.384,-5.831 4.477,-5.924 4.477,-6.056 C21.1 ; C19.1@5.755,-11.516 6.46,-10.811 U2.14@6.906,-10.811 ; C7.1@6.231,-2.708 7.271,-3.748 7.306,-3.748 7.581,-4.023 R1.2 ; U2.1 10.331,-10.16 ; R3.1@10.93,-6.286 R3.1@10.97,-6.247 ; C24.1@13.106,-4.73 C24.1@13.217,-4.619
  Top Layer w0.3: -5.602,-0.482 -5.568,-0.516 -4.715,-0.516 -4.287,-0.943 -4.287,-1.099 C3.1@-4.165,-1.222 ; C14.1 -5.231,-6.176 -3.752,-6.176 U1.48@-2.638,-5.062 ; C3.1 -4.242,-1.299 C3.1@-4.165,-1.222 ; U1.37@-2.593,-0.556 -3.499,-0.556 C3.1@-4.165,-1.222 ; C16.2@-1.617,-13.849 -1.012,-14.455 ccw(c0,0) 1.821,-14.375 ; R11.1 1.821,-14.053 1.821,-14.375 ; v3(2.403,-7.506) R7.1@2.973,-7.506 ; U1.12@2.683,-5.831 C21.1@4.384,-5.831 ; U1.25@2.683,0.254 2.683,0.424 3.437,1.179 4.037,1.179 4.103,1.245 4.262,1.404 C22.1 ; v3(2.889,-11.462) R6.1@2.889,-10.724 ; C18.1 5.53,-13.036 5.53,-13.351 5.458,-13.423 ; C18.1 C19.1 C19.1@5.755,-11.516 ; C17.1 8.366,7.803 ; v3(9.017,7.795) 9.009,7.803 8.366,7.803 ; R4.1 9.696,-6.187 10.112,-6.187 ; U4.1 9.623,6.703 9.373,6.953 8.549,6.953 R12.1 8.366,7.803 ; v3(10.112,-5.506) 10.112,-6.187 ; 10.331,-10.16 cw(c0,0) 5.458,-13.423 ; 10.333,-10.158 ccw(c0.054,-0.053) 12.017,-8.094 12.017,-5.932 v3@12.319,-5.63 ; R3.1@10.858,-6.088 10.759,-6.187 10.112,-6.187 ; v3@12.312,-5.549 13.102,-4.759 13.102,-4.734 C24.1@13.106,-4.73 ; 3.8 13.144,-4.547 C24.1@13.217,-4.619 ; 1.821,-14.375 ccw(c0,0) 5.458,-13.423
  Top Layer w0.4: v3@-6.673,-0.482 -5.602,-0.482 ; R9.2@-6.659,-8.318 -6.659,-7.945 v3(-5.953,-7.239) ; v3@-5.936,-7.147 -5.644,-6.855 -5.644,-6.589 C14.1 ; v3(3.889,0.54) 3.889,0.986 4.103,1.199 C22.1@4.103,1.245
  Top Layer w0.5: v3(2.381,13.954) 3.013,13.954 3.411,13.556 TP2.1 ; 5.839,-2.833 6.106,-2.833 C7.1@6.228,-2.71
  Bottom Layer w0.2: 2.397,-6.667 2.403,-6.673
  Bottom Layer w0.3: v3(2.889,-11.462) 3.937,-11.462 5.214,-12.739 v3(6.516,-12.739) ; v3(10.112,-5.506) v3@10.122,-5.516
  Bottom Layer w0.4: v3(2.381,13.954) 2.937,13.398 P3.1 P3.1@3.311,12.85 ; v3@10.122,-5.516 v3@12.279,-5.516
  Bottom Layer w0.5: v3(-6.683,-0.492) -5.953,-1.222 -5.953,-6.668 v3(-5.953,-7.239) ; -5.953,-6.667 2.397,-6.667 2.984,-6.667 v3@3.937,-5.715 ; v3(2.403,-7.506) 2.403,-6.673 ; v3(3.889,0.54) 4.667,-0.238 4.667,-3.138 ; v3(3.905,-5.683) 4.667,-4.921 4.667,-3.138 ; v3(5.479,-3.138) 4.667,-3.138
  Bottom Layer w0.7: v3@3.937,-5.715 4.889,-6.667 8.921,-6.667 v3@10.112,-5.476 ; 4,12.812 v3(9.017,7.795) 10.112,6.699 v3@10.112,-5.476 ; v3(10.112,-5.506) v3@10.112,-5.476
  other v3: 12.319,-5.506
XC1: C4.1 U1.35 X1.1 | length 5
  Top Layer w0.2: X1.1@-4.183,1.802 -3.225,0.844 -1.602,0.844 -1.368,0.61 U1.35
  Top Layer w0.3: X1.1@-4.421,1.86 C4.1 ; X1.1@-4.405,1.86 X1.1@-4.355,1.81
XC2: C2.1 U1.36 X1.3 | length 5.7
  Top Layer w0.2: X1.3@-5.805,0.66 X1.3@-5.755,0.66 ; X1.3@-5.73,0.619 -5.047,-0.065 -3.388,-0.065 -3.104,0.219 U1.36
  Top Layer w0.3: C2.1@-7.111,0.682 X1.3@-5.843,0.682 ; X1.3@-5.827,0.682 X1.3@-5.805,0.66
pads on no net: U1.28 U2.2 U2.3 U2.13 U2.15 U2.16

## Polygon pours and split planes (outlines as drawn)
GND on Bottom Layer "Bottom" (solid, remove dead copper, pour order 1): -15.192,0.016 -15.192,13.271 -15.192,13.287 -15.192,13.303 -15.192,15.161 15.097,15.161 15.097,-4.445 15.097,-4.493 15.145,-15.176 -15.176,-15.176
GND on Top Layer "Top" (solid, remove dead copper, pour order 2): -15.192,0.016 -15.192,13.271 -15.192,13.287 -15.192,13.303 -15.192,15.161 15.097,15.161 15.097,-4.445 15.097,-4.493 15.145,-15.176 -15.176,-15.176

## Keep-outs
Keep-Out Layer:
  circle w0.254: c-0.031,0 r15

## Other copper
Top Layer:
  region net DEC4_6: -3.487,-3.847 -3.047,-4.183 -3.047,-4.213 -3.261,-4.383 -3.501,-4.516
  region net NetL2_2: -4.015,-5.574 -3.286,-4.975 -4.508,-4.975
  region net DEC3: -2.426,1.916 -1.69,1.281 -2.937,1.281
  pour cut-out: -0.853,1.086 1.841,1.086 1.841,5.638 -0.853,5.638
  pour cut-out: -3.624,3.839 -7.784,3.839 -7.784,-0.114 -3.624,-0.114
Bottom Layer:
  region net BAT-HLDR: 4.731,-13.859 4.253,-14.003 3.284,-14.275 2.444,-14.46 2.142,-14.508 1.729,-14.55 1.376,-14.595 1.143,-14.621 0.964,-14.621 1.162,-12.192 4.111,-12.192 5.207,-13.684
  region net V-BAT: 4.731,13.859 4.253,14.003 3.284,14.275 2.444,14.46 2.142,14.508 1.729,14.55 1.376,14.595 1.143,14.621 1.027,14.621 1.226,12.192 4.111,12.192 5.207,13.684
Multi-Layer:
  pour cut-out: -8.548,12.319 -13.716,12.319 -13.716,-12.467 -8.548,-12.483

## Silkscreen, mask and mechanical layers (free items; w line width, h text height)
Bottom Solder:
  lines w0.5: -0.249,-0.164 ccw(c2.937,0) -0.172,-0.715 ; -0.081,1.033 cw(c2.937,0) 0.144,1.542 ; 0.318,-1.821 ccw(c2.937,0) 0.673,-2.248 ; 0.919,2.47 cw(c2.937,0) 1.378,2.783 ; 1.673,-2.929 ccw(c2.937,0) 2.2,-3.104 ; 2.526,3.163 cw(c2.937,0) 3.082,3.187 ; 3.409,-3.155 ccw(c2.937,0) 3.949,-3.025 ; 4.257,2.904 cw(c2.937,0) 4.742,2.631 ; 5.381,-2.05 ccw(c2.937,0) 5.7,-1.595 ; 5.591,1.77 cw(c2.937,0) 5.858,1.282 ; 6.095,-0.452 ccw(c2.937,0) 6.125,0.103
Bottom Courtyard:
  circle w0.1: c2.937,0 r12